# Altium PCB BUCKCONVERTER-V1L1.PcbDoc (part 3 of 3)
Units mm, origin at the board's own origin, x right, y up, seen from the top; angles counter-clockwise.
Board outline 95.98 x 51.66 mm, 2 copper layers (Top Layer, Bottom Layer); 114 components, 64 nets, 347 pads, 125 vias.
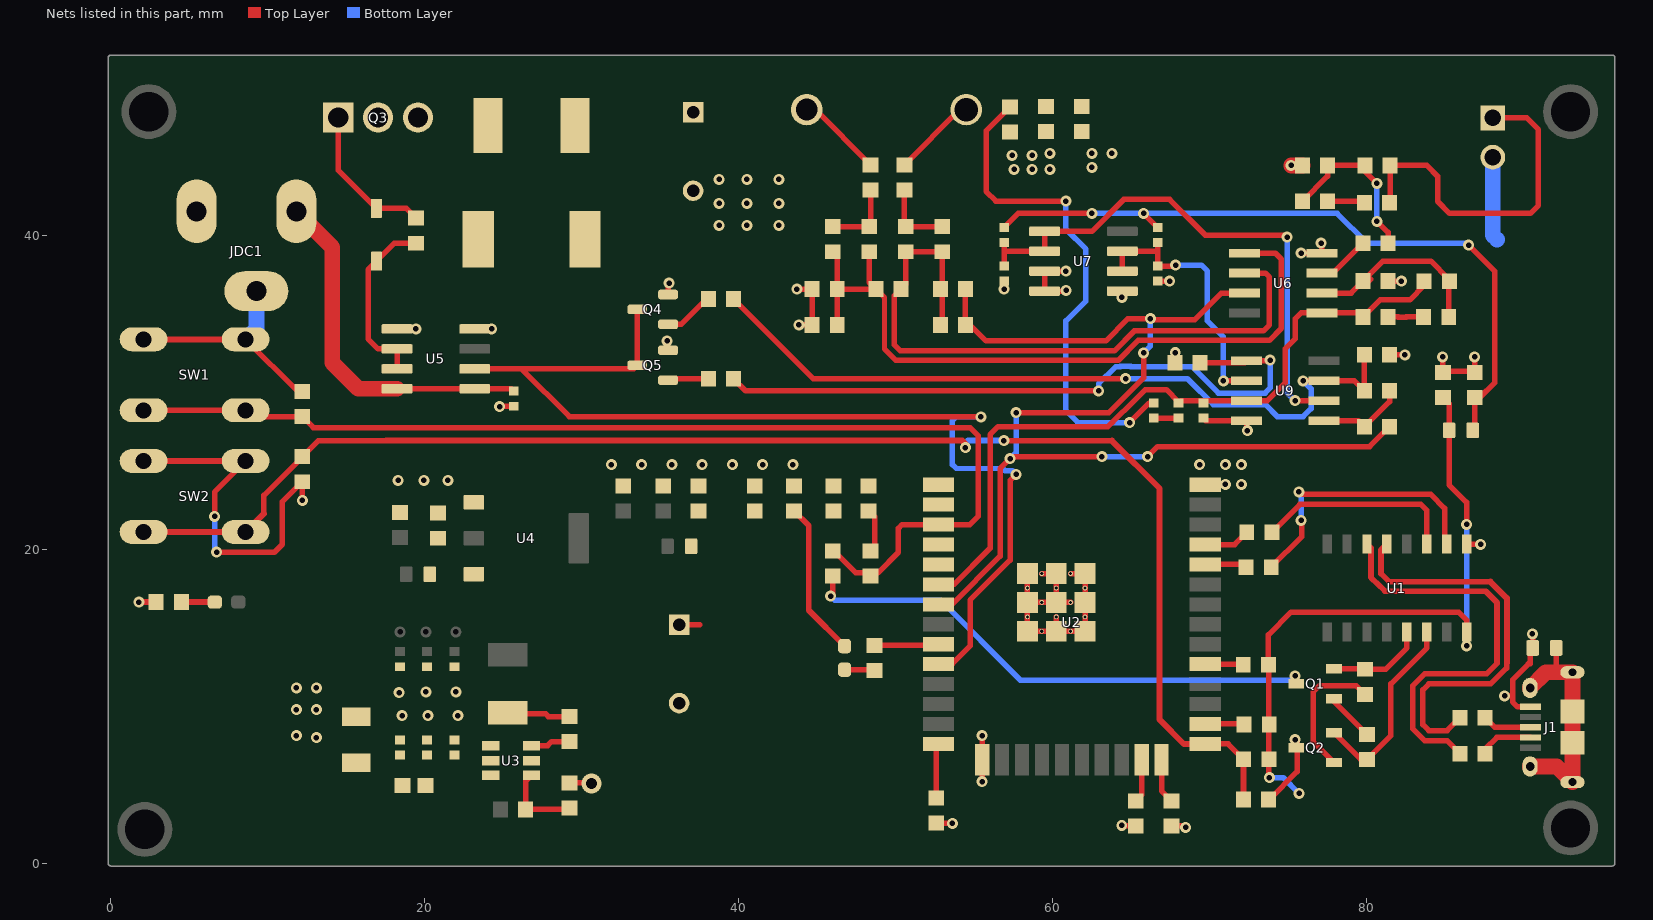
[diagram p2: the nets of this part, all layers, seen from the top]

## Via types
v1: diameter 0.7, hole 0.35, Top Layer to Bottom Layer, tented both sides, 123 vias
v2: diameter 1.27, hole 0.711, Top Layer to Bottom Layer, tented both sides, 2 vias

## Nets (pads, with @x,y where several pads share a name; then routed paths per layer and width w, separated by ;. In a path a pad name is that pad's centre, name@x,y a point inside that pad or via, vN(x,y) a via of type N, cw(c..) or ccw(c..) an arc to the next point about the centre after c; other vN are vias at no path point) (continued)
+5_VOUT: C23.2 C24.2 C25.2 C31.2 J2.1 R22.2 R25.2 R42.2 R_SHUNT.2 | length 59.8
  Top Layer w0.35: R25.2@50.546,44.488 54.064,48.006 R_SHUNT.2@54.483,48.006 ; C23.2@57.274,48.171 55.753,46.65 55.753,42.799 56.371,42.181 v1(60.833,42.181) ; v1(64.897,28.067) 66.139,29.309 R42.2@66.421,29.309 ; C31.2@81.441,42.079 81.483,42.121 R22.2@81.483,44.45 83.82,44.45 84.519,43.751 84.519,42.164 85.281,41.402 90.424,41.402 90.932,41.91 90.932,46.736 90.19,47.478 J2.1@88.028,47.478
  Bottom Layer w0.35: v1(60.833,42.181) 60.833,40.386 62.103,39.116 62.103,35.814 60.833,34.544 60.833,28.829 61.595,28.067 v1(64.897,28.067)
+12: C20.2 F1.1 JDC1.1 Q3.2 U5.1 U5.8 | length 22.9
  Top Layer w0.35: U5.8@18.226,30.226 U5.1@23.176,30.226 25.499,30.226 C20.2@25.654,30.071
  Top Layer w1: JDC1.1@11.811,41.529 14.097,39.243 14.097,31.877 15.748,30.226 U5.8@18.226,30.226
  other v1: 13.081,8.001 11.811,8.128 11.811,9.779 13.081,9.779 11.811,11.176 13.081,11.176
A3V3: C34.2 FB5.1 R21.1 R34.1 | length 45.6
  Top Layer w0.35: R21.1@56.896,40.502 57.404,41.01 57.404,41.021 57.785,41.402 v1(62.484,41.402) ; v1(65.78,41.396) R34.1@66.675,40.502 ; v1(86.487,39.37) 88.138,37.719 88.138,30.607 87.194,29.663 C34.2@86.882,29.663 ; FB5.1@86.743,27.58 86.882,27.719 C34.2@86.882,29.743
  Bottom Layer w0.35: v1(62.484,41.402) 62.49,41.396 v1(65.78,41.396) 78.111,41.396 80.01,39.497 86.487,39.497 86.614,39.37 v1(86.487,39.37)
CUR: C21.2 R26.1 R38.2 U2.7 U6.7 | length 74.6
  Top Layer w0.35: U2.7@52.714,16.494 53.578,16.494 56.642,19.558 56.642,25.146 v1(57.277,25.781) 57.404,25.908 v1(63.119,25.908) ; C21.2@54.432,36.576 R26.1@54.432,34.29 54.737,34.29 55.753,33.274 63.373,33.274 64.77,34.671 66.158,34.671 66.205,34.624 69.041,34.624 70.739,36.322 U6.7@72.212,36.322 ; v1(57.658,28.702) 63.563,28.702 65.786,30.925 v1(65.786,32.512) ; v1(66.04,25.908) 66.675,26.543 80.175,26.543 R38.2@81.445,27.813 ; v1@66.177,34.652 v1(66.213,34.688)
  Bottom Layer w0.35: v1(57.277,25.781) 57.658,26.162 v1(57.658,28.702) ; v1(63.119,25.908) v1(66.04,25.908) ; v1(65.786,32.512) 66.213,32.939 v1(66.213,34.688)
D3V3: C2.2 C3.2 C4.2 C5.2 C18.2 C19.1 C35.2 D1.1 FB4.2 FB5.2 R1.1 R3.2 R4.2 R16.1 U1.16 U2.2 | length 56.8
  Top Layer w0.35: C19.1@36.195,15.2 37.505,15.2 ; C5.2@43.514,22.444 44.45,21.508 44.45,16.117 D1.1@46.736,13.831 ; C3.2@48.26,22.444 48.641,22.063 48.641,20.104 R1.1@48.552,20.104 ; v1(73.787,5.461) 73.756,5.492 R16.1@73.756,6.618 73.756,12.613 R3.2@73.731,12.638 73.731,14.549 75.184,16.002 85.852,16.002 86.36,15.494 U1.16@86.36,14.726 v1(86.36,13.843) ; C35.2@84.85,29.663 85.243,29.27 FB5.2@85.243,27.58 85.243,24.104 86.36,22.987 v1(86.36,21.59)
  Bottom Layer w0.35: v1(73.787,5.461) 74.676,5.461 v1(75.692,4.445) ; v1(86.36,13.843) v1(86.36,21.59)
D_N: R12.1 U1.6 | length 27.2
  Top Layer w0.35: 80.264,18.224 80.279,18.209 80.279,18.187 80.642,17.824 80.664,17.824 81.157,17.332 87.57,17.332 87.57,17.316 ; R12.1@85.941,6.985 85.115,7.81 83.684,7.81 82.931,8.563 82.931,11.312 83.684,12.065 87.63,12.065 88.296,12.731 88.281,12.746
  Top Layer w0.381: U1.6@80.01,20.326 80.264,20.072 80.264,18.224 ; 87.57,17.316 87.586,17.316 88.281,16.621 88.281,12.746
D_P: R11.1 U1.5 | length 26.2
  Top Layer w0.35: 80.899,18.444 81.407,17.936 87.864,17.936 ; R11.1@85.941,9.271 85.115,8.445 83.947,8.445 83.566,8.826 83.566,11.049 83.947,11.43 87.893,11.43 88.9,12.437 88.9,12.731 88.916,12.747
  Top Layer w0.381: 80.899,18.444 80.899,19.945 U1.5@81.28,20.326 ; 87.864,17.936 88.916,16.885 88.916,12.747
DTR: Q1.2 R13.2 U1.13 | length 6.4
  Top Layer w0.35: Q1.2@77.781,12.38 79.86,12.38 R13.2@79.883,12.357 81.191,12.357 82.55,13.716 U1.13@82.55,14.726
GND: *.A C1.1 C2.1 C3.1 C4.1 C5.1 C6.1 C8.1 C9.1 C10.1 C11.1 C12.1 C13.1 C14.1 C15.1 C16.1 C17.1 C18.1 C19.2 C20.1 C22.2 C23.1 C24.1 C25.1 C26.1 C34.1 C35.1 FB1.1 J1.5 J2.2 JDC1.2 JDC1.3 Q4.E Q5.E R7.1 R8.1 R9.1 R18.1 R19.2 R29.2 R30.1 R32.1 R33.2 R35.2 R36.1 R40.1 R43.2 SW1.3 SW1.4 SW2.3 SW2.4 U1.1 U2.1 U2.15 U2.38 U2.39_1 U2.39_2 U2.39_3 U2.39_4 U2.39_5 U2.39_6 U2.39_7 U2.39_8 U2.39_9 U2.39_10 U2.39_11 U2.39_12 U2.39_13 U2.39_14 U2.39_15 U2.39_16 U2.39_17 U2.39_18 U2.39_19 U2.39_20 U2.39_21 U3.1 U4.1 U5.4 U5.5 U6.4 U7.3 U7.4 U7.5 U9.4 | length 104.8
  Top Layer w0.35: v1(6.604,22.098) 6.604,23.647 SW2.3@8.585,25.629 ; v1(6.731,19.812) 10.414,19.812 10.922,20.32 10.922,23.034 C6.1@12.192,24.304 v1(12.192,23.114) ; SW1.3@8.585,33.376 11.909,30.052 C1.1@12.192,30.052 ; U5.5@18.226,34.036 v1(19.431,34.036) ; U5.4@23.176,34.036 v1(24.257,34.036) ; v1(24.765,29.083) 24.793,29.111 C20.1@25.654,29.111 ; R18.1@29.21,5.118 30.569,5.118 v2(30.607,5.08) ; v1(35.433,33.274) 35.433,32.729 Q5.E@35.488,32.674 ; Q4.E@35.488,36.23 35.488,36.885 v1(35.56,36.957) ; v1(43.688,36.576) R29.2@44.666,36.576 C26.1@44.666,34.29 v1(43.815,34.29) ; R8.1@52.566,2.557 53.577,2.557 v1(53.594,2.54) ; v1(55.499,5.207) U2.15@55.499,6.604 v1(55.499,8.128) ; v1(56.896,36.576) R33.2@56.896,37.084 ; U2.39_1@58.379,18.449 U2.39_12@58.379,17.532 U2.39_4@58.379,16.614 ; U2.39_10@59.297,18.449 U2.39_2@60.214,18.449 U2.39_13@60.214,17.532 U2.39_5@60.214,16.614 ; U2.39_18@60.214,15.697 U2.39_8@60.214,14.779 ; v1(60.833,37.719) 60.831,37.717 U7.3@59.474,37.717 U7.4@59.474,36.447 60.806,36.447 v1(60.846,36.487) ; U2.39_16@61.132,16.614 U2.39_5@60.214,16.614 ; U2.39_11@61.132,18.449 U2.39_3@62.049,18.449 U2.39_14@62.049,17.532 U2.39_6@62.049,16.614 U2.39_19@62.049,15.697 U2.39_9@62.049,14.779 U2.39_21@61.132,14.779 U2.39_8@60.214,14.779 ; v1(64.389,2.413) 64.427,2.375 R9.1@65.278,2.375 ; v1(64.394,36.044) 64.424,36.044 U7.5@64.424,36.447 ; R35.2@66.675,37.084 v1(67.437,37.084) ; R7.1@67.564,2.375 68.364,2.375 v1(68.453,2.286) ; R43.2@67.78,31.877 67.78,32.526 v1(67.797,32.526) ; R40.1@69.596,28.349 69.751,28.194 U9.4@72.339,28.194 72.339,27.61 v1(72.39,27.559) ; v1(75.819,38.862) U6.4@77.14,38.862 77.14,39.446 v1(77.089,39.497) ; R32.1@81.356,37.084 82.203,37.084 v1(82.207,37.088) ; R36.1@81.445,32.385 v1(82.423,32.385) ; v1(84.836,32.258) 84.85,32.244 C35.1@84.85,31.263 84.93,31.343 86.882,31.343 86.882,32.244 v1(86.868,32.258) ; U1.1@86.36,20.326 87.243,20.326 v1(87.249,20.32) ; v1(88.773,10.668) 89.281,10.668 ; J1.5@90.424,9.966 89.602,9.966 89.281,10.287 89.281,10.668 ; v1(90.551,14.605) 90.563,14.593 FB1.1@90.563,13.716 90.424,13.577 90.424,12.7 90.297,12.7 89.281,11.684 89.281,10.668 ; U2.39_4@58.379,16.614 U2.39_17@58.379,15.697 U2.39_7@58.379,14.779 U2.39_20@59.297,14.779 U2.39_8@60.214,14.779 ; U2.39_4@58.379,16.614 U2.39_15@59.297,16.614 U2.39_5@60.214,16.614
  Top Layer w0.381: v1(1.778,16.637) R19.2@2.883,16.637 ; SW2.4@2.083,25.629 SW2.3@8.585,25.629 ; SW1.4@2.083,33.376 SW1.3@8.585,33.376
  Top Layer w1: v1(75.184,44.45) R30.1@75.908,44.45
  Bottom Layer w0.35: v1(6.604,22.098) 6.604,19.939 v1(6.731,19.812)
  Bottom Layer w1: SW1.3@8.585,33.376 9.271,34.061 JDC1.3@9.271,36.449 ; J2.2@88.028,44.978 88.028,39.997 88.297,39.728
  other v1: 18.542,9.398 20.193,9.398 22.098,9.398 18.365,10.864 20.066,10.922 21.971,10.922 70.993,24.13 72.009,24.13 18.288,24.384 19.939,24.384 21.463,24.384 31.877,25.4 33.803,25.4 35.729,25.4 37.655,25.4 39.582,25.4 41.508,25.4 43.434,25.4 69.342,25.4 70.993,25.4 72.009,25.4 38.735,40.64 40.513,40.64 42.545,40.64 38.735,42.037 40.513,42.037 42.545,42.037 38.735,43.561 40.513,43.561 42.545,43.561 57.531,44.196 58.674,44.196 59.817,44.196 62.484,44.323 57.404,45.085 58.674,45.085 59.817,45.212 62.484,45.212 63.754,45.212
IO33: R14.2 U2.9 | length 4.1
  Top Layer w0.35: R14.2@48.641,13.881 52.641,13.881 U2.9@52.714,13.954
Net*_C: *.C L2.1 Q3.3
NetC1_2: C1.2 R1.2 R2.1 SW1.1 SW1.2 U2.3 | length 71.2
  Top Layer w0.35: SW1.2@2.083,28.854 SW1.1@8.585,28.854 8.988,28.452 C1.2@12.192,28.452 12.9,27.744 54.737,27.744 55.245,27.236 55.245,22.098 54.721,21.574 U2.3@52.714,21.574 50.403,21.574 50.165,21.336 50.165,19.812 48.857,18.504 R1.2@48.641,18.504 ; R2.1@45.974,19.977 47.447,18.504 R1.2@48.603,18.504
NetC6_2: C6.2 R15.1 R16.2 SW2.1 SW2.2 U2.25 | length 93
  Top Layer w0.35: 9.741,22.263 9.741,23.435 12.192,25.886 C6.2@12.192,25.904 13.212,26.924 17.526,26.924 ; v1(56.879,26.924) 63.754,26.924 ; U2.25@69.714,7.604 71.17,7.604 R16.2@72.156,6.618
  Top Layer w0.381: SW2.2@2.083,21.107 SW2.1@8.585,21.107 9.741,22.263 ; 17.526,26.924 54.229,26.924 54.466,26.687 54.466,26.509 v1(54.434,26.477) ; 63.754,26.924 66.802,23.876 66.802,9.144 68.346,7.6 U2.25@69.206,7.6 ; R15.1@72.136,4.064 72.156,4.084 R16.2@72.156,6.618
  Bottom Layer w0.381: v1(54.434,26.477) 54.434,26.761 54.597,26.924 v1(56.879,26.924)
NetC7_1: C7.1 L1.1 U3.2 | length 4
  Top Layer w0.35: L1.1@25.273,9.58 25.328,9.525 27.686,9.525 27.864,9.347 C7.1@29.21,9.347
NetC7_2: C7.2 U3.6 | length 2.5
  Top Layer w0.35: U3.6@26.797,7.493 27.813,7.493 28.067,7.747 C7.2@29.21,7.747
NetC8_2: C8.2 F1.2 FB2.1
NetC9_2: C9.2 C10.2 FB2.2 U3.3 U3.5
NetC15_2: C15.2 FB3.2 U4.3
NetC21_1: C21.1 C28.1 C30.1 R26.2 R28.2 U6.6 | length 42.7
  Top Layer w0.35: R26.2@52.832,34.29 52.959,34.417 C30.1@52.959,38.951 R28.2@50.631,38.951 50.631,36.877 C28.1@50.33,36.576 49.911,36.157 49.911,33.02 50.292,32.639 63.916,32.639 65.186,33.909 65.405,33.909 73.406,33.909 73.787,34.29 73.787,37.338 73.533,37.592 U6.6@72.212,37.592
NetC22_1: C22.1 L2.2 R24.2 R_SHUNT.1 | length 5.5
  Top Layer w0.35: R_SHUNT.1@44.323,48.006 44.869,48.006 R24.2@48.387,44.488
NetC26_2: C26.2 C27.1 C28.2 R27.2 R29.1 U6.5 | length 47.2
  Top Layer w0.35: C27.1@45.974,38.951 46.266,38.659 R29.1@46.266,36.576 ; C26.2@46.266,34.29 R29.1@46.266,36.576 ; R27.2@48.302,38.951 48.302,37.004 C28.2@48.73,36.576 ; U6.5@72.212,38.862 74.168,38.862 74.549,38.481 74.549,34.067 73.787,33.305 65.436,33.305 64.166,32.035 50.007,32.035 49.276,32.766 49.276,36.03 C28.2@48.73,36.576 ; R29.1@46.266,36.576 C28.2@48.73,36.576
NetC27_2: C27.2 R24.1 R27.1 | length 4.7
  Top Layer w0.35: C27.2@45.974,40.551 R27.1@48.302,40.551 48.387,40.636 R24.1@48.387,42.888
NetC30_2: C30.2 R25.1 R28.1 | length 4.7
  Top Layer w0.35: R25.1@50.546,42.888 50.546,40.636 R28.1@50.631,40.551 C30.2@52.959,40.551
NetC31_1: C31.1 R23.2 | length 2.4
  Top Layer w0.35: R23.2@77.508,42.164 79.756,42.164 C31.1@79.841,42.079
NetC32_1: C32.1 R31.1 R32.2 U6.2 | length 12.3
  Top Layer w0.35: U6.2@77.14,36.322 78.994,36.322 R32.2@79.756,37.084 81.026,38.354 84.074,38.354 85.217,37.211 R31.1@85.217,34.798 ; R32.2@79.947,36.893 80.264,37.211
NetC33_1: C33.1 R31.2 | length 2.3
  Top Layer w0.35: C33.1@81.356,34.798 82.005,34.798 82.01,34.793 82.51,34.793 82.515,34.798 R31.2@83.617,34.798
NetD1_2: D1.2 R14.1 | length 1.9
  Top Layer w0.35: D1.2@46.736,12.331 48.591,12.331 R14.1@48.641,12.281
NetD2_2: D2.2 R19.1 | length 2.1
  Top Layer w0.381: R19.1@4.483,16.637 D2.2@6.616,16.637
NetD3_A: D3.A Q3.1 R20.2 | length 9.6
  Top Layer w0.35: Q3.1@14.478,47.503 14.478,44.149 D3.A@16.916,41.711 18.817,41.711 R20.2@19.431,41.097
NetD3_C: D3.C R20.1 U5.6 U5.7 | length 11.5
  Top Layer w0.35: U5.7@18.226,31.496 U5.6@18.226,32.766 17.018,32.766 16.383,33.401 16.383,37.819 D3.C@16.916,38.351 18.061,39.497 R20.1@19.431,39.497
NetFB1_2: FB1.2 J1.SH1 J1.SH2 J1.SH3 J1.SH4 J1.SH5 J1.SH6 | length 14.8
  Top Layer w0.35: 91.948,12.166 92.063,12.281 FB1.2@92.063,13.716
  Top Layer w1: J1.SH5@90.399,6.166 92.099,6.166 J1.SH1@93.099,5.166 J1.SH3@93.099,7.666 J1.SH2@93.099,9.666 J1.SH4@93.099,12.166 91.948,12.166 91.399,12.166 J1.SH6@90.399,11.166
NetJ1_2: J1.2 R12.2 | length 3.5
  Top Layer w0.35: R12.2@87.541,6.985 87.541,7.279 88.278,8.016 J1.2@90.424,8.016
NetJ1_3: J1.3 R11.2 | length 3.1
  Top Layer w0.35: R11.2@87.541,9.271 88.146,8.666 J1.3@90.424,8.666
NetQ1_1: Q1.1 R5.1 | length 3.2
  Top Layer w0.35: Q1.1@77.781,10.48 77.781,10.433 R5.1@80.01,8.204
NetQ1_3: Q1.3 R2.2 | length 33.9
  Top Layer w0.35: v1(45.847,17.018) 45.974,17.145 R2.2@45.974,18.377 ; v1(75.438,11.938) 75.508,11.868 Q1.3@75.508,11.43
  Bottom Layer w0.35: v1(45.847,17.018) 46.101,16.764 52.832,16.764 57.924,11.672 75.172,11.672 v1(75.438,11.938)
NetQ2_1: Q2.1 R13.1 | length 8.7
  Top Layer w0.35: Q2.1@77.908,6.416 76.581,7.743 76.581,10.922 76.962,11.303 79.337,11.303 R13.1@79.883,10.757
NetQ2_3: Q2.3 R15.2 | length 4.7
  Top Layer w0.35: R15.2@73.736,4.064 73.787,4.064 75.565,5.842 75.565,7.747 v1(75.438,7.874)
NetQ4_B: Q4.B R37.1 | length 3.1
  Top Layer w0.35: Q4.B@35.488,34.33 36.324,34.33 R37.1@37.935,35.941
NetQ4_C: Q4.C Q5.C U2.10 U5.2 | length 68.2
  Top Layer w0.35: U5.2@23.176,31.496 26.162,31.496 ; Q4.C@33.528,35.28 Q5.C@33.528,31.724 33.3,31.496 26.162,31.496 ; U2.10@52.714,12.684 53.578,12.684 54.737,13.843 54.737,16.764 57.285,19.312 57.285,24.392 v1(57.658,24.765) ; v1(55.422,28.431) 55.422,28.45 29.208,28.45 26.162,31.496
  Bottom Layer w0.35: v1(55.422,28.431) 55.405,28.448 53.848,28.448 53.594,28.194 53.594,25.4 53.848,25.146 56.81,25.146 56.954,25.002 57.421,25.002 v1(57.658,24.765)
NetQ5_B: Q5.B R44.1 | length 2.6
  Top Layer w0.35: Q5.B@35.488,30.774 35.575,30.861 R44.1@38.062,30.861
NetR3_1: R3.1 U2.29 | length 2.4
  Top Layer w0.35: U2.29@69.714,12.684 72.085,12.684 R3.1@72.131,12.638
NetR4_1: R4.1 U2.26 | length 2.5
  Top Layer w0.35: U2.26@69.714,8.874 72.15,8.874 R4.1@72.183,8.841
NetR6_1: R6.1 U2.35 | length 3
  Top Layer w0.35: U2.35@69.714,20.304 71.574,20.304 R6.1@72.352,21.082
NetR7_2: R7.2 U2.24 | length 2.9
  Top Layer w0.35: U2.24@66.929,6.604 66.929,4.61 R7.2@67.564,3.975
NetR8_2: R8.2 U2.14 | length 3.5
  Top Layer w0.35: R8.2@52.566,4.157 52.566,7.456 U2.14@52.714,7.604
NetR9_2: R9.2 U2.23 | length 2.8
  Top Layer w0.35: R9.2@65.278,3.975 65.659,4.356 U2.23@65.659,6.604
NetR10_1: R10.1 U2.34 | length 2.7
  Top Layer w0.35: U2.34@69.714,19.034 72.14,19.034 R10.1@72.31,18.864
NetR17_1: R17.1 R18.2 U3.4 | length 5.1
  Top Layer w0.35: U3.4@26.797,5.593 26.416,5.212 R17.1@26.416,3.429 29.172,3.429 R18.2@29.21,3.391
NetR22_1: R22.1 R23.1 R30.2 R45.1 | length 10.9
  Top Layer w0.35: R23.1@75.908,42.164 77.508,43.764 R30.2@77.508,44.45 R22.1@79.883,44.45 79.883,44.069 v1(80.645,43.307) ; v1(80.645,40.894) 81.356,40.183 R45.1@81.356,39.497
  Bottom Layer w0.35: v1(80.645,40.894) v1(80.645,43.307)
NetR36_2: R36.2 R37.2 R39.1 U9.7 | length 48.6
  Top Layer w0.35: R37.2@39.662,35.941 44.742,30.861 62.581,30.861 62.598,30.877 63.243,30.877 63.259,30.861 64.62,30.861 v1(64.632,30.872) ; v1(75.946,30.734) U9.7@77.267,30.734 79.21,30.734 R39.1@79.845,30.099 R36.2@79.845,32.385
  Bottom Layer w0.35: v1(64.632,30.872) 68.569,30.872 68.673,30.768 70.231,29.21 73.533,29.21 74.295,28.448 75.946,28.448 76.454,28.956 76.454,30.226 v1(75.946,30.734)
NetR38_1: R38.1 R39.2 U9.5 | length 5.7
  Top Layer w0.35: U9.5@77.267,28.194 79.464,28.194 R38.1@79.845,27.813 81.445,29.413 R39.2@81.445,30.099
NetR41_2: R41.2 R42.1 | length 1.6
  Top Layer w0.35: R42.1@66.421,28.349 R41.2@68.008,28.349
NetR43_1: R43.1 R44.2 U9.1 | length 42.5
  Top Layer w0.35: R44.2@39.662,30.861 40.424,30.099 v1(62.92,30.098) ; R43.1@69.38,31.877 72.212,31.877 U9.1@72.339,32.004 73.806,32.004 v1(73.847,32.046)
  Bottom Layer w0.35: v1(62.92,30.098) 62.92,30.552 64.008,31.64 64.297,31.64 64.309,31.651 64.954,31.651 64.966,31.64 68.858,31.64 70.543,29.955 73.516,29.955 73.847,30.286 v1(73.847,32.046)
NetR45_2: R45.2 U6.3 | length 3.4
  Top Layer w0.35: U6.3@77.14,37.592 77.851,37.592 R45.2@79.756,39.497
RTS: Q2.2 R5.2 U1.14 | length 12.5
  Top Layer w0.35: Q2.2@77.908,8.316 79.62,6.604 R5.2@80.01,6.604 81.534,8.128 81.534,11.43 83.82,13.716 U1.14@83.82,14.726
RX: R10.2 U1.2 | length 17.8
  Top Layer w0.35: R10.2@73.91,18.864 75.858,20.812 75.858,21.805 v1(75.819,21.844) ; v1(75.666,23.661) 75.721,23.661 75.887,23.495 84.074,23.495 84.963,22.606 84.963,20.453 U1.2@85.09,20.326
  Bottom Layer w0.35: v1(75.666,23.661) 75.819,23.508 v1(75.819,21.844)
TX: R6.2 U1.3 | length 12.9
  Top Layer w0.35: R6.2@73.952,21.082 75.73,22.86 83.439,22.86 83.82,22.479 U1.3@83.82,20.326
VN: U2.5
VOL: C32.2 C33.2 R40.2 R41.1 U2.6 U6.1 U9.3 | length 46.3
  Top Layer w0.35: U2.6@52.714,17.764 53.705,17.764 56.007,20.066 56.007,27.305 56.515,27.813 63.5,27.813 63.785,28.098 63.813,28.098 65.204,29.489 65.889,30.174 67.228,30.174 68.008,29.394 R41.1@68.008,29.309 68.163,29.464 69.596,29.464 U9.3@72.339,29.464 73.66,29.464 74.803,30.607 74.803,32.766 75.438,33.401 75.438,34.671 75.819,35.052 U6.1@77.14,35.052 79.502,35.052 C33.2@79.756,34.798 80.84,35.882 82.745,35.882 83.655,36.792 C32.2@83.655,37.081
VP: U2.4
VREF_CUR: R21.2 R33.1 U7.1 U7.2 U9.6 | length 35.1
  Top Layer w0.35: R33.1@56.896,38.044 56.896,38.987 ; R21.2@56.896,39.542 56.896,38.987 ; v1(74.93,39.878) 74.803,40.005 69.723,40.005 67.437,42.291 64.516,42.291 62.482,40.257 U7.1@59.474,40.257 U7.2@59.474,38.987 56.896,38.987 ; v1(75.438,29.464) U9.6@77.267,29.464
  Bottom Layer w0.35: v1(74.93,39.878) 74.93,29.972 v1(75.438,29.464)
VREF_VOL: R34.2 R35.1 U7.6 U7.7 U9.2 | length 17.3
  Top Layer w0.35: U7.6@64.424,37.717 U7.7@64.424,38.987 66.673,38.987 66.675,38.989 ; R34.2@66.675,39.542 66.675,38.989 ; v1(67.818,38.1) 67.762,38.044 R35.1@66.675,38.044 66.675,38.989 ; v1(70.866,30.734) U9.2@72.339,30.734
  Bottom Layer w0.35: v1(67.818,38.1) 69.469,38.1 69.85,37.719 69.85,37.678 69.833,37.661 69.833,37.015 69.85,36.998 69.85,34.544 70.866,33.528 v1(70.866,30.734)
pads on no net: J1.4 MH1.1 MH2.1 MH3.1 MH4.1 U1.4 U1.7 U1.8 U1.9 U1.10 U1.11 U1.12 U1.15 U2.8 U2.11 U2.12 U2.13 U2.16 U2.17 U2.18 U2.19 U2.20 U2.21 U2.22 U2.27 U2.28 U2.30 U2.31 U2.32 U2.33 U2.36 U2.37 U5.3

## Polygon pours and split planes (outlines as drawn)
D3V3 on Top Layer "D3V3_L01_P027" (solid, pour order 27): 37.962,13.2 37.971,13.208 40.259,13.208 42.418,11.049 42.418,1.27 43.053,0.635 75.946,0.635 76.454,1.143 76.454,4.861 76.254,5.061 75.324,5.061 74.91,4.647 74.91,1.885 74.168,1.143 43.979,1.143 43.561,1.561 43.561,14.351 41.91,16.002 39.497,16.002 38.354,17.145 38.1,16.891 36.195,16.891
GND on Top Layer "GND_L01_P025" (solid, pour order 25): 90.17,45.847 90.043,45.974 86.868,45.974 85.725,47.117 62.865,47.117 62.805,47.057 56.737,47.057 56.269,46.588 56.269,44.341 56.955,43.655 56.989,43.688 62.992,43.688 65.151,45.847 84.201,45.847 85.598,44.45 85.598,42.418 85.852,42.164 89.535,42.164 90.17,42.799
+5_VOUT on Top Layer "+5_VOUT_L01_P024" (solid, pour order 24): 62.992,47.498 63.5,47.625 85.979,47.625 87.122,46.482 89.916,46.482 90.17,46.736 90.17,50.165 89.796,50.539 62.855,50.539
GND on Top Layer "GND_L01_P023" (solid, pour order 23): 29.585,36.76 28.292,38.053 28.292,41.597 29.489,42.794 33.321,42.794 34.997,44.471 42.905,44.471 43.688,43.688 43.688,40.64 43.18,40.132 34.163,40.132 32.639,38.608 32.639,36.957 32.512,36.83
+5_VOUT on Top Layer "+5_VOUT_L01_P022" (solid, pour order 22): 52.705,50.165 53.086,50.546 63.119,50.546 63.881,49.784 63.881,48.006 63.373,47.498 55.88,47.498 55.499,47.117 55.499,46.101 53.34,46.101 52.705,46.736
NetC22_1 on Top Layer "NETC22_1_L01_P021" (solid, pour order 21): 28.677,50.292 45.593,50.292 45.974,49.911 45.974,46.038 45.656,45.72 33.909,45.72 32.512,44.323 28.448,44.323 27.94,44.831 27.94,49.371
Net*_C on Top Layer "NET*_C_L01_P020" (solid, pour order 20): 19.177,50.165 25.527,50.165 26.416,49.276 26.416,37.846 25.4,36.83 22.098,36.83 21.463,37.465 21.463,43.815 20.066,45.212 19.05,45.212 18.415,45.847 18.415,49.403
GND on Top Layer "GND_L01_P017" (solid, pour order 17): 72.136,23.558 72.39,23.812 72.39,25.717 72.263,25.845 68.834,25.845 68.58,25.59 68.58,23.558
GND on Top Layer "GND_L01_P016" (solid, pour order 16): 53.848,23.495 54.102,23.749 54.102,25.527 53.848,25.781 31.877,25.781 31.496,25.4 31.496,23.749 31.75,23.495
D3V3 on Top Layer "D3V3_L01_P015" (solid, pour order 15): 36.438,22.927 36.537,23.025 36.744,23.233 53.71,23.233 53.857,23.087 53.857,22.379 53.784,22.379 53.711,22.306 53.673,22.344 49.773,22.344 49.011,21.582 38.851,21.582 38.47,21.201 38.47,13.708 37.962,13.2 34.66,13.2 33.771,14.089 33.771,17.007 34.163,17.399 35.558,17.399 36.438,18.28
3V3 on Top Layer "3V3_L01_P014" (solid, pour order 14): 22.352,21.336 23.622,21.336 25.4,23.114 35.56,23.114 36.195,22.479 36.195,19.685 35.433,18.923 25.146,18.923 24.13,19.939 22.225,19.939 22.225,21.209
GND on Top Layer "GND_L01_P012" (solid, pour order 12): 23.749,22.479 22.352,22.479 21.59,21.717 17.907,21.717 17.526,22.098 17.526,24.765 17.78,25.019 23.368,25.019 24.003,24.384 24.003,22.733
NetC15_2 on Top Layer "NETC15_2_L01_P011" (solid, pour order 11): 20.169,21.371 21.428,21.371 21.59,21.209 21.59,19.177 21.717,19.05 24.13,19.05 24.384,18.796 24.384,17.653 24.257,17.526 20.066,17.526 19.812,17.78 19.812,21.215 19.973,21.368
5V on Top Layer "5V_L01_P010" (solid, pour order 10): 17.653,14.986 17.653,21.287 17.829,21.463 19.369,21.463 19.558,21.274 19.558,17.272 19.558,15.748 20.701,14.605 20.828,14.605
GND on Top Layer "GND_L01_P009" (solid, pour order 9): 24.814,7.292 24.742,7.196 23.207,7.196 22.849,7.555 21.99,7.555 21.26,8.284 21.801,8.826 22.625,8.826 23.543,7.908 24.668,7.908 24.814,7.761
GND on Top Layer "GND_L01_P008" (solid, pour order 8): 17.907,12.827 22.479,12.827 22.86,12.446 22.86,7.874 22.479,7.493 18.034,7.493 17.653,7.874 17.653,12.573
5V on Top Layer "5V_L01_P007" (solid, pour order 7): 26.924,14.478 26.162,15.24 17.907,15.24 17.653,14.986 17.653,13.335 17.907,13.081 23.241,13.081 23.622,12.7 23.622,12.319 23.876,12.065 26.67,12.065 26.924,12.319
NetC9_2 on Top Layer "NETC9_2_L01_P006" (solid, remove dead copper, pour order 6): 23.837,5.965 23.837,5.966 25.321,5.966 26.204,6.849 27.35,6.849 27.391,6.807 27.391,6.271 27.293,6.172 26.111,6.172 25.146,5.207 23.749,5.207
NetC7_1 on Top Layer "NETC7_1_L01_P005" (solid, pour order 5): 23.622,6.223 25.019,6.223 25.781,6.985 25.781,7.874 26.797,8.89 26.797,10.414 26.416,10.795 23.876,10.795 23.622,10.541 23.622,8.636 24.003,8.255 24.817,8.255 25.146,7.926 25.146,7.239 24.892,6.985 23.622,6.985
NetC9_2 on Top Layer "NETC9_2_L01_P004" (solid, pour order 4): 19.558,4.064 20.828,4.064 21.844,5.08 24.777,5.08 24.892,5.195 24.892,5.902 24.819,5.975 24.81,5.965 22.864,5.965 22.606,6.223 22.606,7.112 22.434,7.284 19.73,7.284 19.431,6.985 19.431,4.191
NetC8_2 on Top Layer "NETC8_2_L01_P003" (solid, pour order 3): 14.732,7.366 18.796,7.366 19.177,6.985 19.177,4.318 18.923,4.064 14.732,4.064 14.478,4.318 14.478,7.112
+12 on Top Layer "+12_L01_P002" (solid, pour order 2): 11.557,11.684 16.637,11.684 17.145,11.176 17.145,8.509 16.764,8.128 13.97,8.128 13.716,7.874 13.716,7.112 13.589,6.985 11.176,6.985 10.922,7.239 10.922,11.049
GND on Bottom Layer "GND_L02_P030" (solid, pour order 30): 1.016,34.036 14.986,34.036 16.637,35.687 33.02,35.687 35.687,38.354 43.434,38.354 45.932,40.852 95.038,40.852 95.631,40.259 95.631,0.381 95.123,-0.127 0.635,-0.127 -0.127,0.635 0,0.762 0,34.036
GND on Bottom Layer "GND_L02_P029" (solid, pour order 29): 3.827,43.197 3.827,39.353 6.985,36.195 6.985,35.56 7.747,34.798 14.986,34.798 16.51,36.322 32.258,36.322 34.925,38.989 43.18,38.989 46.355,42.164 91.059,42.164 91.44,42.545 91.44,50.165 90.678,50.927 19.939,50.927 19.304,50.292 19.304,43.561 14.351,38.608 8.382,38.608 7.366,39.624 7.366,43.18 6.731,43.815 4.445,43.815
+12 on Bottom Layer "+12_L02_P028" (solid, pour order 28): 13.97,39.878 13.97,42.926 10.287,46.609 4.318,46.609 0.635,42.926 0.762,42.799 0.762,37.592 3.683,34.671 3.683,10.922 7.62,6.985 13.589,6.985 13.716,7.112 13.716,11.557 13.589,11.684 9.79,11.684 6.223,15.251 6.223,35.814 3.302,38.735 3.302,43.18 4.445,44.323 7.493,44.323 9.271,42.545 9.271,41.783
+12 on Bottom Layer "+12_L02_P019" (solid, pour order 19): 13.208,39.116 9.017,39.116 8.128,40.005 8.128,49.403 9.271,50.546 17.653,50.546 18.288,49.911 18.288,46.609 17.78,46.101 16.129,46.101 16.129,46.228 15.875,46.482 15.875,48.641 15.494,49.022 13.335,49.022 13.081,48.768 13.081,43.815 13.97,42.926 13.97,39.878

## Keep-outs
Keep-Out Layer:
  lines w0.35: 0,0 0,51.308 95.631,51.308 95.631,0 0,0

## Silkscreen, mask and mechanical layers (free items; w line width, h text height)
Top Overlay:
  lines w0.127: 17.78,8.89 17.78,10.922 22.606,10.922 22.606,8.89 17.78,8.89 ; 17.78,14.732 22.606,14.732 22.606,16.764 17.78,16.764 17.78,14.732 ; 41.656,18.415 44.323,18.415 44.323,20.447 41.656,20.447 41.656,18.415 ; 44.196,27.94 54.61,27.94 54.61,32.893 44.196,32.893 44.196,27.94 ; 56.134,49.53 62.992,49.53 62.992,50.8 56.134,50.8 56.134,49.53 ; 71.882,13.843 71.882,17.653 73.914,17.653 73.914,13.843 71.882,13.843 ; 71.882,22.225 71.882,24.892 73.914,24.892 73.914,22.225 71.882,22.225

## Text inside footprints (layer, text, board x,y; h text height)
SW1: Mechanical 13 "4" at 1.775,33.912 h0.8 r180; Mechanical 13 "3" at 9.91,33.911 h0.8 r180; Mechanical 13 "2" at 1.773,29.589 h0.8 r180; Mechanical 13 "1" at 9.655,29.463 h0.8 r180
SW2: Mechanical 13 "4" at 1.775,26.165 h0.8 r180; Mechanical 13 "3" at 9.91,26.164 h0.8 r180; Mechanical 13 "2" at 1.773,21.842 h0.8 r180; Mechanical 13 "1" at 9.655,21.716 h0.8 r180